# Altium PCB Barun Gas Control.PcbDoc
Units mil, origin at the board's own origin, x right, y up, seen from the top; angles counter-clockwise.
Board outline 4682.84 x 3482.84 mil, 2 copper layers (Top Layer, Bottom Layer); 32 components, 30 nets, 120 pads, 0 vias.
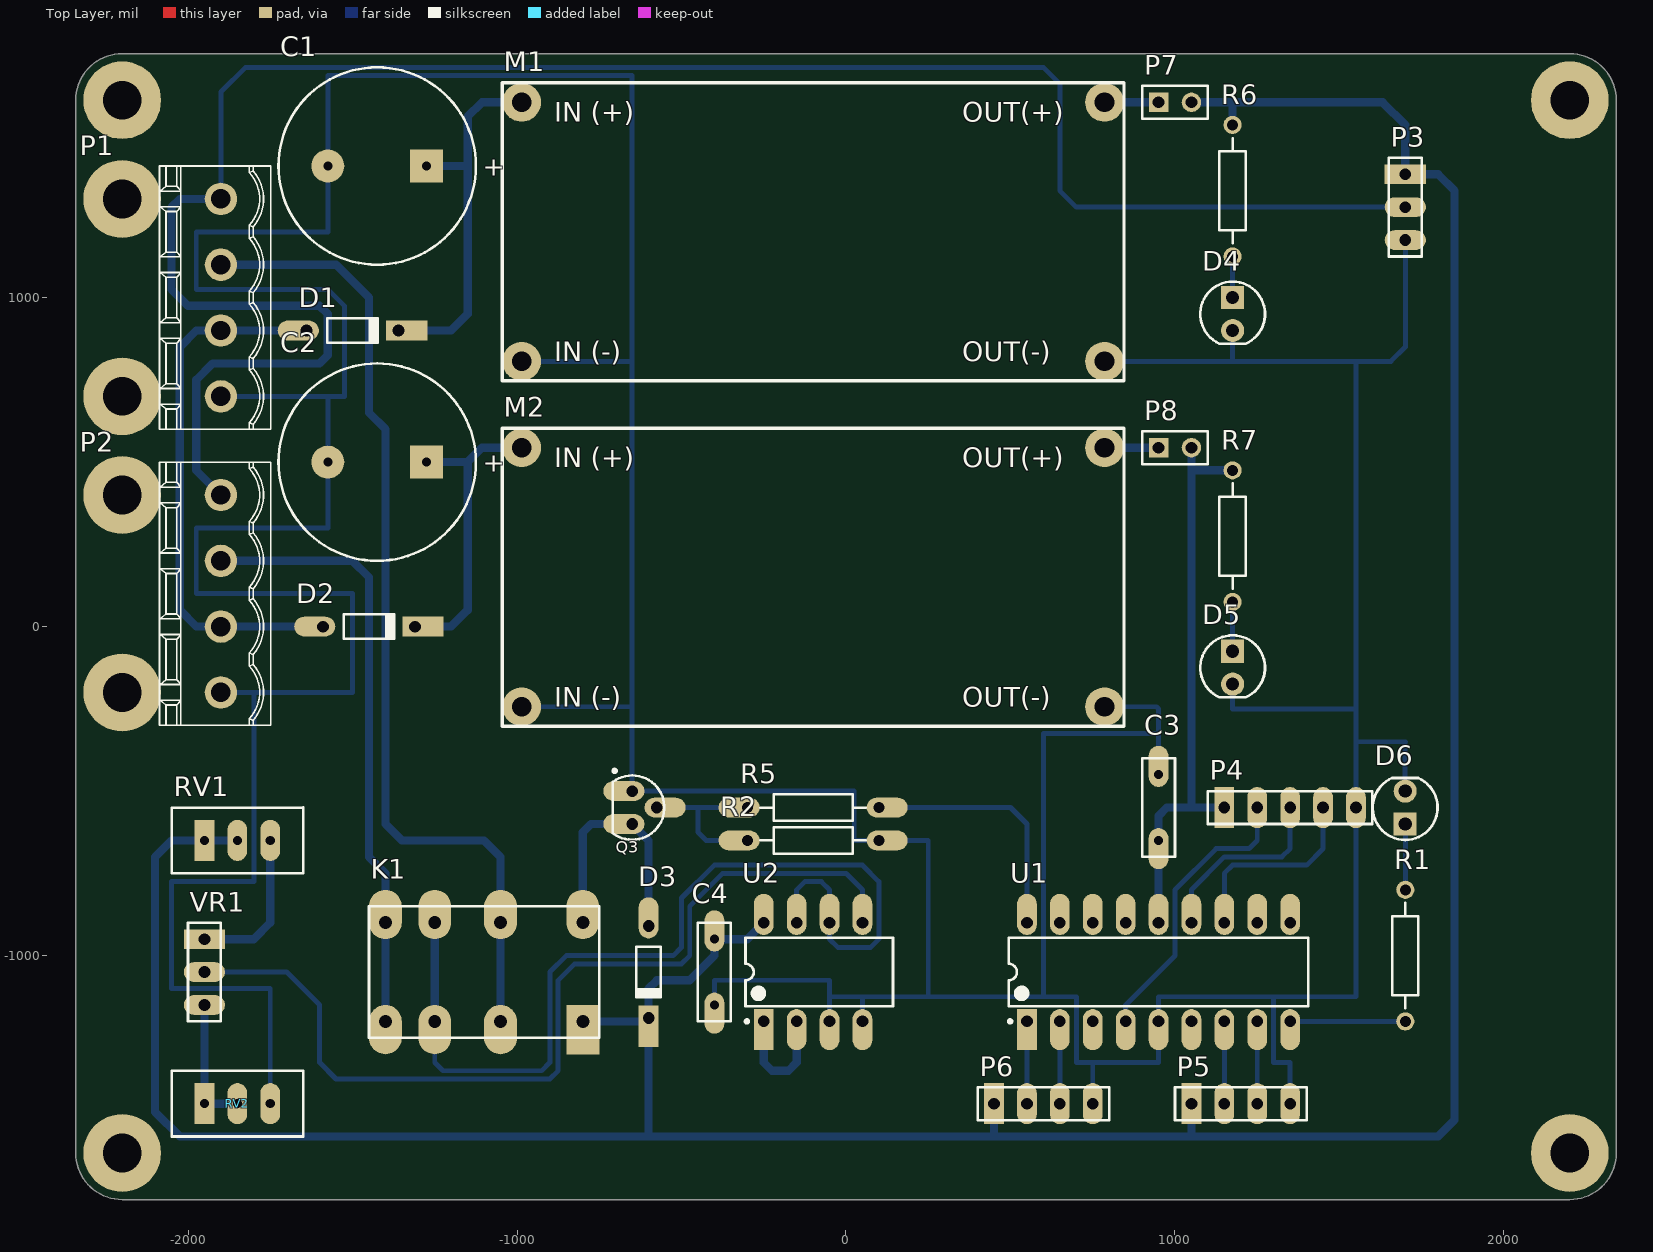
[diagram p0: Top Layer view]
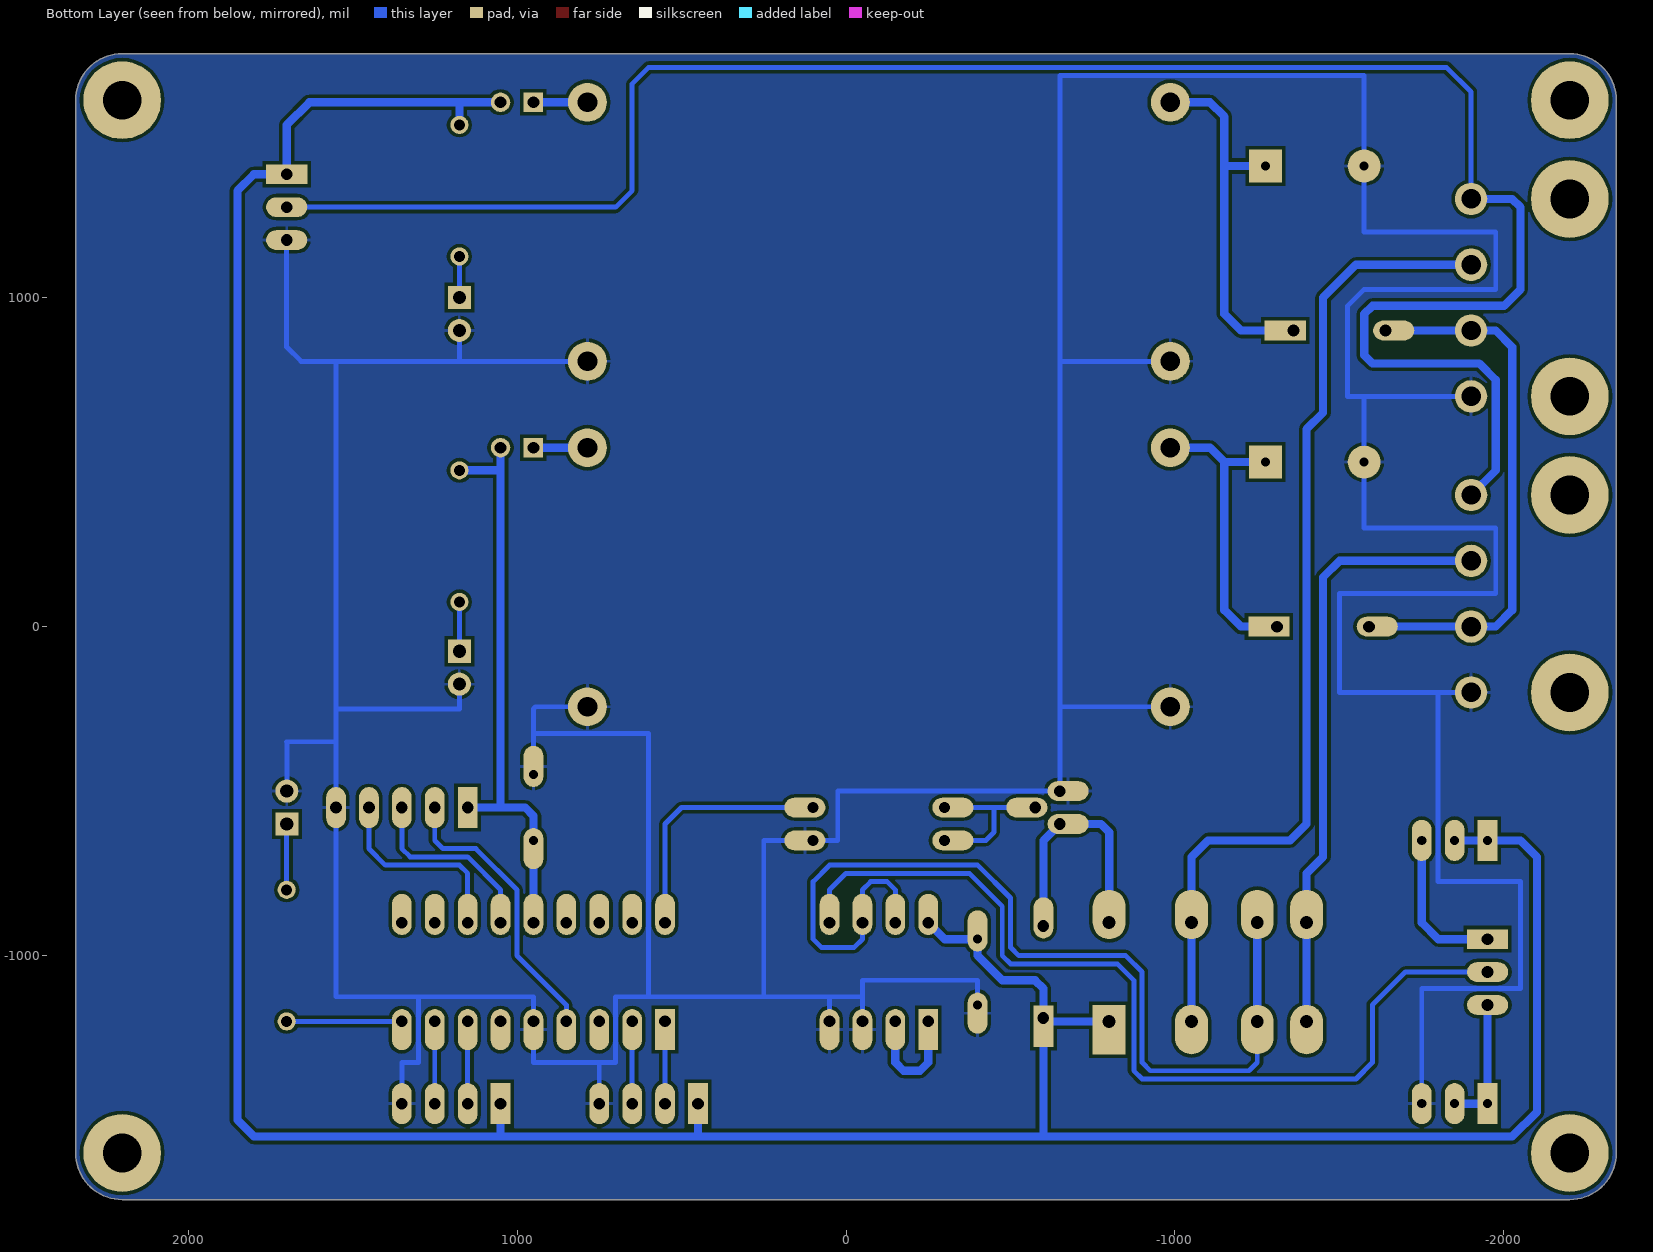
[diagram p1: Bottom Layer view, seen from below]

## Layer stack, top to bottom
Top Solder: solder mask 0.4, Solder Resist, Dk 3.5
Top Layer: signal copper 1.4
Dielectric 1: dielectric 12.6, FR-4, Dk 4.8
Bottom Layer: signal copper 1.4
Bottom Solder: solder mask 0.4, Solder Resist, Dk 3.5

## Board outline
-2341.42,-1600 ccw(c-2200,-1600) -2200,-1741.42 2200,-1741.42 ccw(c2200,-1600) 2341.42,-1600 2341.42,1600 ccw(c2200,1600) 2200,1741.42 -2200,1741.42 ccw(c-2200,1600) -2341.42,1600

## Design rules (kind name [scope] priority, off if disabled: settings)
Clearance [All] p1: gap=10
PolygonConnect [All] p1: connectstyle=Relief reliefconductorwidth=10 reliefentries=4 polygonreliefangle="90 Angle" airgapwidth=10
RoomDefinition "Barun Gas Control" [InComponentClass('Barun Gas Control')] p1: confinementstyle=ConfineIn formatcopy=TRUE lockcomponents=FALSE outline -2300,-1750 2300,-1750 2300,1850 -2300,1850
RoutingVias [All] p1: holewidth=31.5 width=62.99 viastyle="Through Hole" minholewidth=3.94 minwidth=3.94 maxholewidth=157.48 maxwidth=196.85
SolderMaskExpansion [All] p1: expansion=4
Width [All] p1: maxlimit=100 minlimit=10 preferedwidth=15
30 further rules are at their usual default settings.

## Components (designator, comment, footprint, x,y, rotation, side; value= is the part's Value field where it differs from the comment)
C1 "Cap Pol3" RB7.6-15 -1425,1400 r0 top
C2 "Cap Pol3" RB7.6-15 -1425,500 r0 top
C3 "100nF" "CAP RADIAL 0.200" 950,-550 r270 top
C4 "100nF" "CAP RADIAL 0.200" -400,-1050 r90 top
D1 "Diode 1N4148" DO-35 -1500,900 r0 top
D2 "Diode 1N4148" DO-35 -1450,0 r0 top
D3 "Diode 1N4148" DO-35 -600,-1050 r270 top
D4 "LED (RED)" "LED(3D) 5MM VERTICAL (GREEN)" 1175,950 r90 top
D5 "LED (GREEN)" "LED(3D) 5MM VERTICAL (GREEN)" 1175,-125 r90 top
D6 "LED (BLUE)" "LED(3D) 5MM VERTICAL (GREEN)" 1700,-550 r270 top
K1 "Relay-DPDT" "RELAY DPDT" -1100,-1050 r180 top
M1 "LM2596 MODULE" "LM2596 Module" -100,1200 r0 top
M2 "LM2596 MODULE" "LM2596 Module" -100,150 r0 top
P1 "Header 4" "5.08mm HEADER 4 Way - With Socket" -1900,700 r90 top
P2 "Header 4" "5.08mm HEADER 4 Way - With Socket" -1900,-200 r90 top
P3 "DUTY_DISPLAY" HDR1X3 1700,1375 r270 top
P4 "Header 5" HDR1X5 1150,-550 r0 top
P5 "Header 4" HDR1X4 1050,-1450 r0 top
P6 "Header 4" HDR1X4 450,-1450 r0 top
P7 "Header 2" HDR1X2 950,1593.7 r0 top
P8 "Header 2" HDR1X2 950,543.7 r0 top
Q3 "2N3904" TO-92A -650,-550 r180 top
R1 "Res2" AXIAL-0.4#1 1700,-1000 r270 top
R2 "Res2" AXIAL-0.4#2 -100,-650 r180 top
R5 "Res2" AXIAL-0.4#2 -100,-550 r180 top
R6 "Res2" AXIAL-0.4#1 1175,1325 r270 top
R7 "Res2" AXIAL-0.4#1 1175,275 r270 top
RV1 "10k" TRIMMER -1850,-650 r0 top
RV2 "10k" TRIMMER -1850,-1450 r0 top
U1 "PIC16F648A" DIP-18 900,-1050 r90 top
U2 "LM392M" DIP_8 -100,-1050 r90 top
VR1 "DUTY" HDR1X3 -1950,-950 r270 top

## Footprints (in the part's own frame and the unit in brackets; to place one, negate y for a bottom-side part, rotate by r counter-clockwise, add the part's x,y. Pads: shape width x height; smd on the part's side, far side on the other; paste and mask are expansions set on the pad)
"5.08mm HEADER 4 Way - With Socket" [mm] "PHOENIX CONTACT 1758034 & 1758035"
  round 2.5 hole 1.5: 1(0,0) 2(5.08,0) 3(10.16,0) 4(15.24,0)
  silkscreen extent -2.54,-3.86 17.78,4.74, body extent -2.54,-3.86 17.78,11.14, height 22
AXIAL-0.4#1 [mm] "Axial Device, Thru-Hole; 2 Leads; 0.4 in Pin Spacing"
  round 1.4 hole 0.85: 1(-5.08,0) 2(5.08,0)
  silkscreen extent -4.06,-1.02 4.06,1.02
AXIAL-0.4#2 [mm] "Axial Device, Thru-Hole; 2 Leads; 0.4 in Pin Spacing"
  oval 3.175x1.524 hole 0.85 copper offset -0.635,0: 1(-5.08,0)
  oval 3.175x1.524 hole 0.85 copper offset 0.635,0: 2(5.08,0)
  silkscreen extent -4.06,-1.02 4.06,1.02
"CAP RADIAL 0.200" [mil]
  oval 125x60 hole 27.56 copper offset -25,0: 1(-100,0)
  oval 125x60 hole 27.56 copper offset 25,0: 2(100,0)
  silkscreen extent -150,-50 150,50, body extent -110,-49 107,49, height 257
DIP-18 [mil]
  rect 125x60 hole 35.43 copper offset -25,0: 1(-150,350)
  oval 125x60 hole 35.43 copper offset -25,0: 2(-150,250) 3(-150,150) 4(-150,50) 5(-150,-50) 6(-150,-150) 7(-150,-250) 8(-150,-350) 9(-150,-450)
  oval 125x60 hole 35.43 copper offset 25,0: 10(150,-450) 11(150,-350) 12(150,-250) 13(150,-150) 14(150,-50) 15(150,50) 16(150,150) 17(150,250) 18(150,350)
  silkscreen extent -155,-506 104,406, body extent -161,-510 169,410, height 211
DIP_8 [mil]
  rect 125x60 hole 35.43 copper offset -25,0: 1(-150,150)
  oval 125x60 hole 35.43 copper offset -25,0: 2(-150,50) 3(-150,-50) 4(-150,-150)
  oval 125x60 hole 35.43 copper offset 25,0: 5(150,-150) 6(150,-50) 7(150,50) 8(150,150)
  silkscreen extent -155,-243 104,206, body extent -155,-225 155,225, height 175
DO-35 [mm] "Diode, Axial; Body 3.8 x 1.9 mm (LxDia. max), Lead Dia. 0.53 mm (max)"
  oval 3.175x1.524 hole 0.9 copper offset -0.635,0: 1(-3.55,0)
  rect 3.175x1.524 hole 0.9 copper offset 0.635,0: 2(3.55,0)
  silkscreen extent -1.95,-0.95 2.05,0.95
HDR1X2 [mm] "Connector; Header; 2 Position"
  rect 1.5x1.5 hole 0.9: 1(0,0)
  round 1.5 hole 0.9: 2(2.54,0)
  silkscreen extent -1.27,-1.27 3.81,1.27
HDR1X3 [mil] "Connector; Header; 3 Position"
  rect 60x125 hole 35.43: 1(0,0)
  oval 60x125 hole 35.43: 2(100,0) 3(200,0)
  silkscreen extent -50,-50 250,50
HDR1X4 [mil] "Connector; Header; 4 Position"
  rect 60x125 hole 35.43: 1(0,0)
  oval 60x125 hole 35.43: 2(100,0) 3(200,0) 4(300,0)
  silkscreen extent -50,-50 350,50
HDR1X5 [mil] "Connector; Header; 5 Position"
  rect 60x125 hole 35.43: 1(0,0)
  oval 60x125 hole 35.43: 2(100,0) 3(200,0) 4(300,0) 5(400,0)
  silkscreen extent -50,-50 450,50
"LED(3D) 5MM VERTICAL (GREEN)" [mil]
  rect 70x70 hole 40: 1(50.06,-0.28)
  round 70 hole 40: 2(-49.94,-0.28)
  silkscreen extent -90,-99 98,98, body extent -99,-98 98,98, height 413
"LM2596 Module" [mm]
  round 3 hole 1.524: 1(-22.5,10) 2(-22.5,-10) 3(22.5,-10) 4(22.5,10)
  silkscreen extent -24,-11.5 24,11.5
RB7.6-15 [mm] "Polarized Capacitor (Radial); 2 Leads"
  rect 2.54x2.54 hole 0.7: 1(3.81,0)
  round 2.54 hole 0.7: 2(-3.81,0)
  silkscreen extent -7.62,-7.62 7.62,7.62
"RELAY DPDT" [mm]
  oval 2.54x3.81 hole 1 copper offset 0,0.635: 1(7.62,3.81) 2(3.81,3.81) 3(-1.27,3.81)
  oval 2.54x3.81 hole 1 copper offset 0,-0.635: 4(7.62,-3.81) 5(3.81,-3.81) 6(-1.27,-3.81) 8(-7.62,-3.81)
  rect 2.54x3.81 hole 1 copper offset 0,0.635: 7(-7.62,3.81)
  silkscreen extent -8.89,-5.08 8.89,5.08
TO-92A [mil] "TO, Flat Index; 3 In-Line, Axial Leads; Body Dia. 4.5mm; Leads 0.51 x 0.48 mm (max)"
  oval 125x60 hole 35.43 copper offset 25,0: 1(0,-50) 3(0,50)
  oval 125x60 hole 35.43 copper offset -25,0: 2(-75,0)
  silkscreen extent -98,-116 59,98, body extent -98,-98 59,98, height 270
TRIMMER [mil] "Thru-Hole; 3 Leads"
  rect 60x125 hole 27.56: 1(-100,0)
  oval 60x125 hole 27.56: 2(0,0) 3(100,0)
  silkscreen extent -200,-100 200,100, body extent -188,-95 188,95, height 455

## Part data
C1 C2: "Polarized Capacitor (Surface Mount)"
C3 C4: library part CAP, "CAPACITOR SMD 0402"
D1 D2 D3: "High Conductance Fast Diode"
D4 D5 D6: library part "LED 3mm RED", "3mm RED LED"
K1: "Altronics S4136 12V Coil"
P1 P2 P5 P6: "Header, 4-Pin"
P3: library part "Header 3", "Header, 3-Pin"
P4: "Header, 5-Pin"
P7 P8: "Header, 2-Pin"
Q3: "NPN General Purpose Amplifier"
R1 R2 R5 R6 R7: "Resistor"
RV1 RV2: library part "VAR (POT) SMD", "Variable Resistor"
U1: library part PIC16F87/88, "PIC16F88"
U2: "Low Power Operational Amplifier/Voltage Comparator, 8-pin Narrow SOIC"
VR1: library part RPot, "Potentiometer"

## Free pads (board coordinates)
  round 236.22 hole 118.11: MOUNT(-2200,-1600) MOUNT(-2200,-200) MOUNT(-2200,400) MOUNT(-2200,700) MOUNT(-2200,1300) MOUNT(-2200,1600) MOUNT(2200,-1600) MOUNT(2200,1600)

## Nets (pads, with @x,y where several pads share a name; then routed paths per layer and width w, separated by ;. In a path a pad name is that pad's centre, name@x,y a point inside that pad or via, vN(x,y) a via of type N, cw(c..) or ccw(c..) an arc to the next point about the centre after c; other vN are vias at no path point)
12V: C4.2 D3.2 K1.7 P3.1 P5.1 P6.1 P7.2 R6.1 RV1.1 RV1.2 U2.8 | length 10256.7
  Bottom Layer w25: RV1.2 RV1.1 -2050,-650 -2100,-700 -2100,-1475 -2025,-1550 -600,-1550 ; K1.7 -610.24,-1200 D3.2 ; U2.8 -300,-950 C4.2 -400,-1000 -475,-1075 -575,-1075 -600,-1100 D3.2 ; P6.1 450,-1550 ; P5.1 1050,-1550 ; P7.2 1175,1593.7 ; R6.1 1175,1593.7 ; -600,-1550 D3.2 ; -600,-1550 450,-1550 ; 450,-1550 1050,-1550 ; 1050,-1550 1800,-1550 1850,-1500 1850,1325 1800,1375 P3.1 1700,1525 1631.3,1593.7 1175,1593.7
\MCLR: P4.2 U1.4 | length 874.3
  Bottom Layer w15: U1.4 850,-1150 1000,-1000 1000,-800 1125,-675 1225,-675 1250,-650 P4.2
GND: C1.2 C2.2 C3.1 C4.1 D4.2 D5.2 D6.2 M1.2 M1.3 M2.2 M2.3 P1.1 P2.1 P3.3 P4.5 P5.4 P6.4 Q3.1 R2.1 RV2.3 U1.5 U2.3 U2.4 | length 20124.8
  Bottom Layer w15: P2.1 -1800,-200 ; P1.1 -1575,700 ; RV2.3 -1750,-1100 -2050,-1100 -2050,-775 -1800,-775 -1800,-200 ; M2.2 -656.3,-243.7 -650,-250 ; M1.2 -656.3,806.3 -650,800 ; C4.1 -400,-1075 -50,-1075 -50,-1125 ; U2.3 -50,-1125 ; U2.4 50,-1125 ; P6.4 750,-1325 ; M2.3 943.7,-243.7 950,-250 950,-325 ; M1.3 1175,806.3 ; C3.1 950,-325 ; D5.2 1175.28,-249.72 1175,-250 1550,-250 ; D4.2 1175.28,806.58 1175,806.3 ; P5.4 1350,-1325 1300,-1325 1300,-1125 ; D6.2 1699.72,-350.28 1700,-350 1550,-350 ; P3.3 1700,850 1656.3,806.3 1543.7,806.3 ; -1800,-200 -1500,-200 -1500,100 -1975,100 -1975,300 -1575,300 C2.2 -1575,700 ; -1575,700 -1525,700 -1525,975 -1575,1025 -1975,1025 -1975,1200 -1575,1200 C1.2 -1575,1675 -650,1675 -650,800 ; -650,-250 -650,800 ; -650,-250 Q3.1 25,-500 25,-650 R2.1 250,-650 250,-1125 ; -50,-1125 50,-1125 ; 50,-1125 250,-1125 ; 250,-1125 600,-1125 ; 600,-1125 700,-1125 700,-1325 750,-1325 ; 600,-1125 600,-325 950,-325 ; 750,-1325 950,-1325 U1.5 950,-1125 1300,-1125 ; 1175,806.3 1543.7,806.3 ; 1300,-1125 1550,-1125 P4.5 1550,-350 ; 1543.7,806.3 1550,800 1550,-250 ; 1550,-350 1550,-250
M\A\N\/PID: R5.1 U1.18 | length 770.7
  Bottom Layer w15: R5.1 500,-550 550,-600 U1.18
MANUAL: P5.2 U1.7 | length 250
  Bottom Layer w15: P5.2 U1.7
MANUAL_CONTROL: K1.2 K1.5 U2.6 U2.7 | length 3030.3
  Bottom Layer w15: K1.2 -1250,-1325 -1225,-1350 -925,-1350 -900,-1325 -900,-1050 -850,-1000 -525,-1000 -500,-975 -500,-825 -400,-725 50,-725 100,-775 100,-950 75,-975 -25,-975 -50,-950 U2.6 -50,-800 -75,-775 -125,-775 -150,-800 U2.7
  Bottom Layer w25: K1.2 K1.5
MANUAL_LED: P5.3 U1.8 | length 250
  Bottom Layer w15: P5.3 U1.8
MANUAL_SET: U2.5 VR1.2 | length 2865.7
  Bottom Layer w15: VR1.2 -1700,-1050 -1600,-1150 -1600,-1325 -1550,-1375 -900,-1375 -875,-1350 -875,-1075 -825,-1025 -500,-1025 -475,-1000 -475,-850 -375,-750 0,-750 50,-800 U2.5
NetC1_1: C1.1 D1.2 M1.1 | length 1103
  Bottom Layer w25: D1.2@-1325,900 -1200,900 -1150,950 -1150,1400 ; C1.1 -1150,1400 ; M1.1 -1106.3,1593.7 -1150,1550 -1150,1400
NetC2_1: C2.1 D2.2 M2.1 | length 953
  Bottom Layer w25: D2.2@-1325,0 -1200,0 -1150,50 -1150,500 ; C2.1 -1150,500 ; M2.1 -1106.3,543.7 -1150,500
NetD3_1: D3.1 K1.8 Q3.3 | length 766.3
  Bottom Layer w25: K1.8 -800,-625 -775,-600 Q3.3 -600,-650 D3.1
NetD4_1: D4.1 R6.2 | length 125.1
  Bottom Layer w15: R6.2 1175.28,1124.72 D4.1
NetD5_1: D5.1 R7.2 | length 150.1
  Bottom Layer w15: R7.2 1175.28,74.72 D5.1
NetD6_1: D6.1 R1.1 | length 200.1
  Bottom Layer w15: D6.1 1700,-600.34 R1.1
NetM1_4: M1.4 P7.1 | length 164.2
  Bottom Layer w25: M1.4 P7.1
NetM2_4: M2.4 P8.1 | length 164.2
  Bottom Layer w25: M2.4 P8.1
NetQ3_2: Q3.2 R2.2 R5.2 | length 510.4
  Bottom Layer w15: Q3.2 -450,-550 ; R2.2 -425,-650 -450,-625 -450,-550 ; R5.2 -450,-550
NetRV1_3: RV1.3 VR1.1 | length 470.7
  Bottom Layer w25: VR1.1 -1800,-950 -1750,-900 RV1.3
NetRV2_1: RV2.1 RV2.2 VR1.3 | length 400
  Bottom Layer w25: VR1.3 RV2.1 RV2.2
NetU2_1: U2.1 U2.2 | length 370.7
  Bottom Layer w25: U2.1 -250,-1325 -225,-1350 -175,-1350 -150,-1325 U2.2
PG_CLCK: P4.4 U1.12 | length 606.1
  Bottom Layer w15: U1.12 1150,-750 1175,-725 1400,-725 1450,-675 P4.4
PG_DATA: P4.3 U1.13 | length 576.8
  Bottom Layer w15: U1.13 1050,-800 1150,-700 1325,-700 1350,-675 P4.3
PID: P6.2 U1.1 | length 250
  Bottom Layer w15: P6.2 U1.1
PID_CONTROL: K1.3 K1.6 P1.3 | length 3003.6
  Bottom Layer w25: P1.3 -1550,1100 -1450,1000 -1450,650 -1400,600 -1400,-600 -1350,-650 -1100,-650 -1050,-700 K1.6 K1.3
PID_LED: P6.3 U1.2 | length 250
  Bottom Layer w15: P6.3 U1.2
STATUS_0: R1.2 U1.9 | length 350
  Bottom Layer w15: U1.9 R1.2
VALVE_CONTROL: K1.1 K1.4 P2.3 | length 1841.4
  Bottom Layer w25: P2.3 -1500,200 -1450,150 -1450,-700 -1400,-750 K1.4 K1.1
VALVE_POSITION: P1.4 P2.4 P3.2 | length 6176
  Bottom Layer w15: P1.4 -1900,1625 -1825,1700 600,1700 650,1650 650,1325 700,1275 P3.2
  Bottom Layer w25: P2.4 -1975,475 -1975,750 -1925,800 -1600,800 -1575,825 -1575,950 -1600,975 -2000,975 -2050,1025 -2050,1275 -2025,1300 P1.4
VCC: C3.2 P4.1 P8.2 R7.1 U1.14 | length 1754.1
  Bottom Layer w25: U1.14 C3.2 950,-575 975,-550 1050,-550 ; P8.2 1050,475 ; P4.1 1050,-550 ; R7.1 1050,475 ; 1050,-550 1050,475
VIN: D1.1 D2.1 P1.2 P2.2 | length 1651.7
  Bottom Layer w25: D1.1 P1.2 -1975,900 -2025,850 -2025,50 -1975,0 P2.2 D2.1@-1600,0
pads on no net: U1.3 U1.6 U1.10 U1.11 U1.15 U1.16 U1.17

## Polygon pours and split planes (outlines as drawn)
GND on Bottom Layer "Bottom Ground" (solid, remove dead copper, pour order 0): -2341.42,-1600 ccw(c-2200,-1600) -2200,-1741.42 2200,-1741.42 ccw(c2200,-1600) 2341.42,-1600 2341.42,1600 ccw(c2200,1600) 2200,1741.42 -2200,1741.42 ccw(c-2200,1600) -2341.42,1600

## Silkscreen, mask and mechanical layers (free items; w line width, h text height)
Mechanical 2:
  the board outline again, w7.87
Mechanical 4:
  drawing of 2461 lines, arcs and shapes, not listed

## Text inside footprints (layer, text, board x,y; h text height)
C1: Top Overlay "+" at -1104.85,1370.99 h59.06
C2: Top Overlay "+" at -1104.85,470.99 h59.06
M1: Top Overlay "OUT(-)" at 352.76,806.3 h60; Top Overlay "OUT(+)" at 352.76,1534.65 h60; Top Overlay "IN (-)" at -887.4,806.3 h60; Top Overlay "IN (+)" at -887.4,1534.65 h60
M2: Top Overlay "OUT(-)" at 352.76,-243.7 h60; Top Overlay "OUT(+)" at 352.76,484.65 h60; Top Overlay "IN (-)" at -887.4,-243.7 h60; Top Overlay "IN (+)" at -887.4,484.65 h60